# EAGLE board Module-paneled (EAGLE 6.6.0)
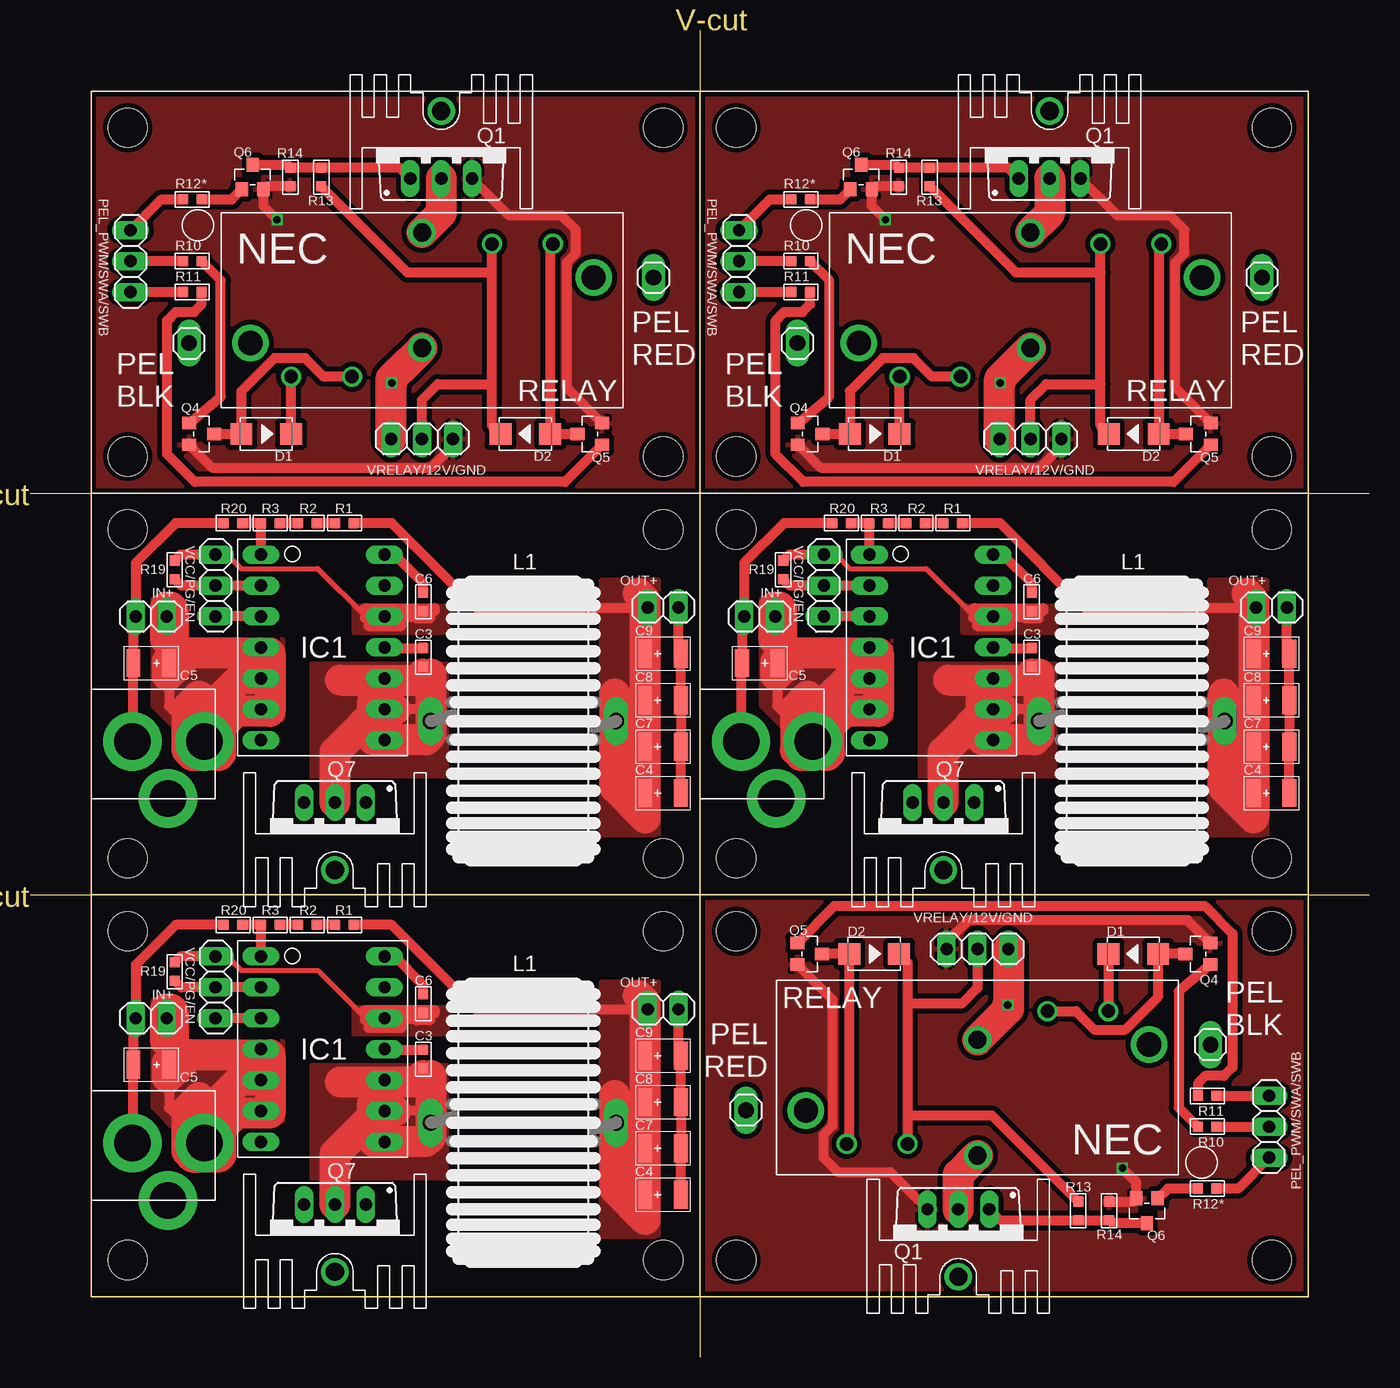
[diagram p0: board, top side]
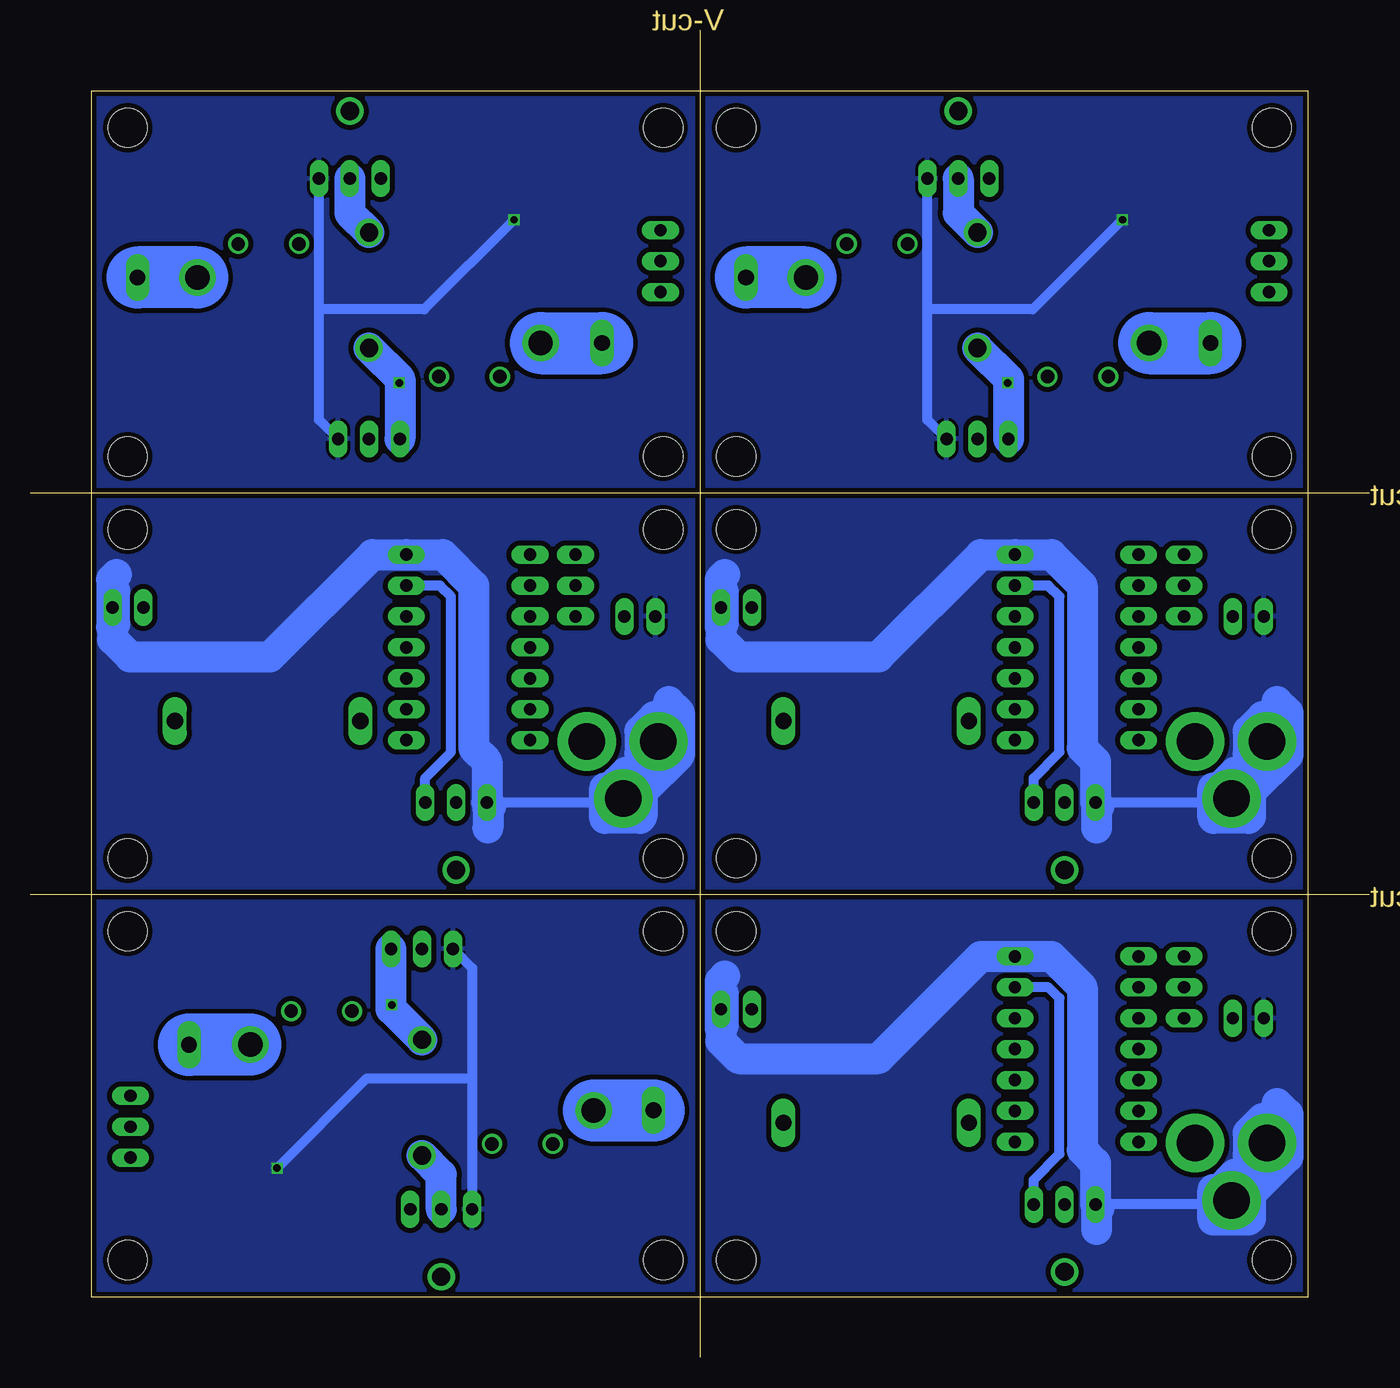
[diagram p1: board, bottom side, seen from below]

Size 110 x 109 mm. Coordinates in mm from the lower left corner, seen from the top.
Outline: 55,109 55,0
Outline: 0,38 110,38
Outline: 0,71 110,71
Outline: 5,104 105,104 105,5 5,5 5,104
Copper layers (1*16): Top 0.035mm / dielectric 1.5mm / Bottom 0.035mm
Design rules "SeeedStudio_2layer_DRU_no_angle_20140221": minimum track width 6mil, minimum drill 12mil, track to track 6mil, track to pad 6mil, pad to pad 6mil, via to via 6mil, smd to smd 0mil, copper to edge 10mil, drill to drill 10mil, minimum pad ring 10mil, minimum via ring 6mil, stop-mask expansion 2mil, vias tented up to drill 100mil, thermal gap 10mil
Holes 3.2 mm at 8,68 8,41 52,41 52,68 58,68 58,41 102,41 102,68 8,101 52,101 52,74 8,74 58,101 102,101 102,74 58,74 8,35 8,8 52,8 52,35 102,8 58,8 58,35 102,35

## Footprints (pad centres in the part's own frame; a part is rotated, then mirrored left to right if it is on the bottom)
AVX-B = smd 1.143 x 2.286: + -1.46,0; - 1.46,0
C0603 = smd 0.889 x 0.889: 1 0,0.762; 2 0,-0.762
DO-214AC = smd 1.8 x 1.77: 1 -2.042,0; 2 2.042,0
HEAT11PB015 = drill 1.5: P$1 0,3
RT7258GQW-BREAK = drill 1.016 long: P$1 -5.08,7.62; P$2 -5.08,5.08; P$3 -5.08,2.54; P$4 -5.08,0; P$5 -5.08,-2.54; P$6 -5.08,-5.08; P$7 -5.08,-7.62; P$8 5.08,-7.62; P$9 5.08,-5.08; P$10 5.08,-2.54; P$11 5.08,0; P$12 5.08,2.54; P$13 5.08,5.08; P$14 5.08,7.62
1X02 = drill 1.016 long: 1 -1.27,0; 2 1.27,0
PJ-102A-NOOUT = drill 3 pad 4.8: RING 0.1,-3.39; RING_SW -4.6,-6.29; TIP 0.1,-9.29
SFT1240 = drill 1.321 long: 1 -7.62,0; 2 7.62,0
1X03 = drill 1.016 long: 1 -2.54,0; 2 0,0; 3 2.54,0
1X01LONG = drill 1.3 long: 1 0,0
TO220BV = drill 1.016 long: D 0,-2.54; G -2.54,-2.54; S 2.54,-2.54
SOT-23 = smd 1.016 x 1.143: 1 -0.889,-1.016; 2 0.889,-1.016; 3 0,1.016
R0603 = smd 0.889 x 0.889: 1 0,0.762; 2 0,-0.762
NEC-EP2 = drill 2: P$1 -14.1,-2.7; P$8 14.1,2.7 | drill 1.1: P$2 -10.75,-5.45; P$3 -5.75,-5.45; P$6 5.75,5.45; P$7 10.75,5.45 | drill 1.5: P$4 0,-3.1; P$5 0,6.4

## Placement (x,y rotation side)
C1  22uf  [AVX-B]  59.92,57.04 180 top
C2  1uf  [C0603]  82.28,62.05 0 top
C3  1uf  [C0603]  32.28,57.51 180 top
C4  22uf  [AVX-B]  51.99,46.36 0 top
C5  22uf  [AVX-B]  9.92,57.04 180 top
C6  1uf  [C0603]  32.28,62.05 0 top
C7  22uf  [AVX-B]  51.99,50.17 0 top
C8  22uf  [AVX-B]  51.99,53.98 0 top
C9  22uf  [AVX-B]  51.99,57.79 0 top
C10  1uf  [C0603]  82.28,57.51 180 top
C11  22uf  [AVX-B]  101.99,46.36 0 top
C12  22uf  [AVX-B]  101.99,50.17 0 top
C13  22uf  [AVX-B]  101.99,53.98 0 top
C14  22uf  [AVX-B]  101.99,57.79 0 top
C15  22uf  [AVX-B]  9.92,24.04 180 top
C16  1uf  [C0603]  32.28,29.05 0 top
C17  1uf  [C0603]  32.28,24.51 180 top
C18  22uf  [AVX-B]  51.99,13.36 0 top
C19  22uf  [AVX-B]  51.99,17.17 0 top
C20  22uf  [AVX-B]  51.99,20.98 0 top
C21  22uf  [AVX-B]  51.99,24.79 0 top
D1  1N4007  [DO-214AC]  19.38,75.85 0 top
D2  1N4007  [DO-214AC]  40.66,75.85 180 top
D3  1N4007  [DO-214AC]  69.38,75.85 0 top
D4  1N4007  [DO-214AC]  90.66,75.85 180 top
D5  1N4007  [DO-214AC]  90.62,33.15 180 top
D6  1N4007  [DO-214AC]  69.34,33.15 0 top
HEATSINK  HEAT111PB015  [HEAT11PB015]  33.75,99.37 0 top
HEATSINK1  HEAT111PB015  [HEAT11PB015]  25.02,43.03 180 top
HEATSINK2  HEAT111PB015  [HEAT11PB015]  75.02,43.03 180 top
HEATSINK3  HEAT111PB015  [HEAT11PB015]  83.75,99.37 0 top
HEATSINK4  HEAT111PB015  [HEAT11PB015]  25.02,10.03 180 top
HEATSINK5  HEAT111PB015  [HEAT11PB015]  76.25,9.63 180 top
IC1  RT7258-BREAKQWB  [RT7258GQW-BREAK]  24.02,58.32 0 top
IC2  RT7258-BREAKQWB  [RT7258GQW-BREAK]  74.02,58.32 0 top
IC3  RT7258-BREAKQWB  [RT7258GQW-BREAK]  24.02,25.32 0 top
IN  [1X02]  9.92,60.86 180 top
IN1  [1X02]  59.92,60.86 180 top
IN2  [1X02]  9.92,27.86 180 top
JACK  2.1MMJACKTHM-NOOUT  [PJ-102A-NOOUT]  5,50.5 90 top
JACK1  2.1MMJACKTHM-NOOUT  [PJ-102A-NOOUT]  55,50.5 90 top
JACK2  2.1MMJACKTHM-NOOUT  [PJ-102A-NOOUT]  5,17.5 90 top
L1  SFT1240  [SFT1240]  40.51,52.27 0 top
L2  SFT1240  [SFT1240]  90.51,52.27 0 top
L3  SFT1240  [SFT1240]  40.51,19.27 0 top
LOGIC  [1X03]  8.23,90.05 90 top
LOGIC1  [1X03]  58.23,90.05 90 top
LOGIC2  [1X03]  101.77,18.95 270 top
MONITOR  [1X03]  15.21,63.4 270 top
MONITOR1  [1X03]  65.21,63.4 270 top
MONITOR2  [1X03]  15.21,30.4 270 top
OUT  [1X02]  51.99,61.6 0 top
OUT1  [1X02]  101.99,61.6 0 top
OUT2  [1X02]  51.99,28.6 0 top
PEL_BLK  [1X01LONG]  13.03,83.32 90 top
PEL_BLK1  [1X01LONG]  63.03,83.32 90 top
PEL_BLK2  [1X01LONG]  96.97,25.68 270 top
PEL_RED  [1X01LONG]  51.2,88.7 90 top
PEL_RED1  [1X01LONG]  101.2,88.7 90 top
PEL_RED2  [1X01LONG]  58.8,20.3 270 top
POWER  [1X03]  32.18,75.44 0 top
POWER1  [1X03]  82.18,75.44 0 top
POWER2  [1X03]  77.82,33.55 180 top
Q1  IRLB3813PBF  [TO220BV]  75.02,43.03 180 top
Q2  IRLB3813PBF  [TO220BV]  33.75,99.37 0 top
Q3  S9013  [SOT-23]  64.07,75.85 270 top
Q4  S9013  [SOT-23]  14.07,75.85 270 top
Q5  S9013  [SOT-23]  45.97,75.85 90 top
Q6  S9013  [SOT-23]  18.26,96.96 0 top
Q7  IRLB3813PBF  [TO220BV]  25.02,43.03 180 top
Q8  S9013  [SOT-23]  95.97,75.85 90 top
Q9  S9013  [SOT-23]  68.26,96.96 0 top
Q10  IRLB3813PBF  [TO220BV]  83.75,99.37 0 top
Q11  IRLB3813PBF  [TO220BV]  25.02,10.03 180 top
Q12  S9013  [SOT-23]  95.93,33.15 90 top
Q13  S9013  [SOT-23]  64.03,33.15 270 top
Q14  S9013  [SOT-23]  91.74,12.04 180 top
Q15  IRLB3813PBF  [TO220BV]  76.25,9.63 180 top
R1  10K 1/10W  [R0603]  25.8,68.53 90 top
R2  10K 1/10W  [R0603]  22.75,68.53 90 top
R3  10K 1/10W  [R0603]  19.7,68.53 90 top
R4  10K 1/10W  [R0603]  61.86,64.7 0 top
R5  10K 1/10W  [R0603]  66.66,68.53 90 top
R6  10K 1/10W  [R0603]  75.8,68.53 90 top
R7  10K 1/10W  [R0603]  72.75,68.53 90 top
R8  10K 1/10W  [R0603]  69.7,68.53 90 top
R9  1K 1/10W  [R0603]  63.31,95.13 90 top
R10  10K 1/10W  [R0603]  13.31,90.05 90 top
R11  10K 1/10W  [R0603]  13.31,87.51 270 top
R12  1K 1/10W  [R0603]  13.31,95.13 90 top
R13  10K 1/10W  [R0603]  23.9,96.96 0 top
R14  10K 1/10W  [R0603]  21.36,96.96 180 top
R15  10K 1/10W  [R0603]  73.9,96.96 0 top
R16  10K 1/10W  [R0603]  71.36,96.96 180 top
R17  10K 1/10W  [R0603]  63.31,90.05 90 top
R18  10K 1/10W  [R0603]  63.31,87.51 270 top
R19  10K 1/10W  [R0603]  11.86,64.7 0 top
R20  10K 1/10W  [R0603]  16.66,68.53 90 top
R21  10K 1/10W  [R0603]  11.86,31.7 0 top
R22  10K 1/10W  [R0603]  16.66,35.53 90 top
R23  10K 1/10W  [R0603]  25.8,35.53 90 top
R24  10K 1/10W  [R0603]  22.75,35.53 90 top
R25  10K 1/10W  [R0603]  19.7,35.53 90 top
R26  1K 1/10W  [R0603]  96.69,13.87 270 top
R27  10K 1/10W  [R0603]  86.1,12.04 180 top
R28  10K 1/10W  [R0603]  88.64,12.04 0 top
R29  10K 1/10W  [R0603]  96.69,18.95 270 top
R30  10K 1/10W  [R0603]  96.69,21.49 90 top
RELAY  NEC-RELAY2EP2  [NEC-EP2]  32.18,86.01 0 top
RELAY1  NEC-RELAY2EP2  [NEC-EP2]  82.18,86.01 0 top
RELAY2  NEC-RELAY2EP2  [NEC-EP2]  77.82,22.99 180 top

## Library data of the parts
C1 C4 C5 C7-C9 C11-C15 C18-C21 = Seeed-Capacitor; MPN: TAJB226*016#NJ
C2 C3 C6 C10 C16 C17 = Seeed-Capacitor; MPN: CC0603KRX7R8BB105
D1-D6 = Seeed-Diode; MPN: 1N4007
HEATSINK HEATSINK1-HEATSINK5 = PCR-Connector
IC1-IC3 = PCR-IC
IN IN1 IN2 LOGIC LOGIC1 LOGIC2 MONITOR MONITOR1 MONITOR2 OUT OUT1 OUT2 PEL_BLK PEL_BLK1 PEL_BLK2 PEL_RED PEL_RED1 PEL_RED2 POWER POWER1 POWER2 = pinhead
JACK JACK1 JACK2 = adafruit
L1-L3 = inductors
Q1 Q2 Q7 Q10 Q11 Q15 = transistor-power
Q3-Q6 Q8 Q9 Q12-Q14 = Seeed-Transistor; MPN: S9013
R1-R8 R10 R11 R13-R25 R27-R30 = Seeed-Resistor; MPN: RC0603JR-0710KL
R9 R12 R26 = Seeed-Resistor; MPN: RC0603JR-071KL
RELAY RELAY1 RELAY2 = PCR-Switch

## Nets
3V1: C11.+ C12.+ C13.+ C14.+ L2.2 OUT1.1 R6.2
3V2: C18.+ C19.+ C20.+ C21.+ L3.2 OUT2.1 R23.2
3V3: C4.+ C7.+ C8.+ C9.+ L1.2 OUT.1 R1.2
12V: C5.+ IC1.P$4 IC1.P$5 IC1.P$6 IN.1 JACK.TIP
12V1: C1.+ IC2.P$4 IC2.P$5 IC2.P$6 IN1.1 JACK1.TIP
12V2: D2.2 POWER.2 R13.2 RELAY.P$6
12V3: D4.2 POWER1.2 R15.2 RELAY1.P$6
12V4: C15.+ IC3.P$4 IC3.P$5 IC3.P$6 IN2.1 JACK2.TIP
12V5: D6.2 POWER2.2 R27.2 RELAY2.P$6
EN/SYNC: IC1.P$3 MONITOR.3
EN/SYNC1: IC2.P$3 MONITOR1.3
EN/SYNC2: IC3.P$3 MONITOR2.3
FB: IC1.P$1 R3.1 R20.2
FB1: IC2.P$1 R5.2 R8.1
FB2: IC3.P$1 R22.2 R25.1
GND: C4.- C5.- C6.1 C7.- C8.- C9.- IC1.P$14 IN.2 JACK.RING JACK.RING_SW OUT.2 Q7.S R20.1
GND1: C1.- C2.1 C11.- C12.- C13.- C14.- IC2.P$14 IN1.2 JACK1.RING JACK1.RING_SW OUT1.2 Q1.S R5.1
GND2: POWER.3 Q2.S Q4.2 Q5.2 Q6.2 R14.1
GND3: POWER1.3 Q3.2 Q8.2 Q9.2 Q10.S R16.1
GND4: C15.- C16.1 C18.- C19.- C20.- C21.- IC3.P$14 IN2.2 JACK2.RING JACK2.RING_SW OUT2.2 Q11.S R22.1
GND5: POWER2.3 Q12.2 Q13.2 Q14.2 Q15.S R28.1
N$1: R2.1 R3.2
N$2: R1.1 R2.2
N$3: C10.2 IC2.P$11
N$4: IC2.P$13 Q1.G
N$5: R7.1 R8.2
N$6: R6.1 R7.2
N$7: Q2.D RELAY.P$5
N$8: Q2.G Q6.3 R13.1 R14.2
N$9: PEL_RED.1 RELAY.P$8
N$10: PEL_BLK.1 RELAY.P$1
N$11: D1.2 RELAY.P$2
N$12: Q10.D RELAY1.P$5
N$13: C3.2 IC1.P$11
N$14: Q9.3 Q10.G R15.1 R16.2
N$15: IC1.P$13 Q7.G
N$16: Q9.1 R9.2
N$17: D3.1 Q3.3 RELAY1.P$3
N$18: D4.1 Q8.3 RELAY1.P$7
N$19: Q3.1 R17.2
N$20: Q8.1 R18.1
N$21: PEL_RED1.1 RELAY1.P$8
N$22: PEL_BLK1.1 RELAY1.P$1
N$23: D3.2 RELAY1.P$2
N$24: C17.2 IC3.P$11
N$25: IC3.P$13 Q11.G
N$26: R24.1 R25.2
N$27: R23.1 R24.2
N$28: Q15.D RELAY2.P$5
N$29: Q14.3 Q15.G R27.1 R28.2
N$30: Q6.1 R12.2
N$31: Q14.1 R26.2
N$32: D5.1 Q12.3 RELAY2.P$3
N$33: D1.1 Q4.3 RELAY.P$3
N$34: Q4.1 R10.2
N$35: Q5.1 R11.1
N$36: D2.1 Q5.3 RELAY.P$7
N$37: D6.1 Q13.3 RELAY2.P$7
N$38: Q12.1 R29.2
N$39: Q13.1 R30.1
N$40: PEL_RED2.1 RELAY2.P$8
N$41: PEL_BLK2.1 RELAY2.P$1
N$42: D5.2 RELAY2.P$2
PEL_PWM: LOGIC.3 R12.1
PEL_PWM1: LOGIC1.3 R9.1
PEL_PWM2: LOGIC2.3 R26.1
PEL_SWA: LOGIC.2 R10.1
PEL_SWA1: LOGIC1.2 R17.1
PEL_SWA2: LOGIC2.2 R29.1
PEL_SWB: LOGIC.1 R11.2
PEL_SWB1: LOGIC1.1 R18.2
PEL_SWB2: LOGIC2.1 R30.2
PGOOD: IC1.P$2 MONITOR.2 R19.2
PGOOD1: IC2.P$2 MONITOR1.2 R4.2
PGOOD2: IC3.P$2 MONITOR2.2 R21.2
SW: C3.1 IC1.P$8 IC1.P$9 IC1.P$10 L1.1 Q7.D
SW1: C10.1 IC2.P$8 IC2.P$9 IC2.P$10 L2.1 Q1.D
SW2: C17.1 IC3.P$8 IC3.P$9 IC3.P$10 L3.1 Q11.D
VCC: C6.2 IC1.P$12 MONITOR.1 R19.1
VCC1: C2.2 IC2.P$12 MONITOR1.1 R4.1
VCC2: C16.2 IC3.P$12 MONITOR2.1 R21.1
VRELAY: POWER.1 RELAY.P$4
VRELAY1: POWER1.1 RELAY1.P$4
VRELAY2: POWER2.1 RELAY2.P$4

## Tracks (layer width: path | path; a pad name or v marks a point on that pad's centre or on a via)
3V1
  Top 0.813: 100.53,52.35 C13.+ C14.+ 100.53,60.44 OUT1.1 86.62,61.6 79.69,68.53 R6.2 | 100.53,52.35 C12.+ C11.+ | L2.2 98.2,52.35 100.53,52.35
  Top 2.54: 99.95,62.74 100.51,62.18 100.51,44.33 98.03,46.81 98.03,54.51
  pour Top: 101.58,63.86 101.58,42.9 96.93,42.9 96.93,63.86
3V2
  Top 0.813: 50.53,19.35 C20.+ C21.+ 50.53,27.44 OUT2.1 36.62,28.6 29.69,35.53 R23.2 | 50.53,19.35 C19.+ C18.+ | L3.2 48.2,19.35 50.53,19.35
  Top 2.54: 49.95,29.74 50.51,29.18 50.51,11.32 48.02,13.81 48.02,21.51
  pour Top: 51.58,30.86 51.58,9.9 46.93,9.9 46.93,30.86
3V3
  Top 0.813: 50.53,52.35 C8.+ C9.+ 50.53,60.44 OUT.1 36.62,61.6 29.69,68.53 R1.2 | 50.53,52.35 C7.+ C4.+ | L1.2 48.2,52.35 50.53,52.35
  Top 2.54: 49.95,62.74 50.51,62.18 50.51,44.33 48.02,46.81 48.02,54.51
  pour Top: 51.58,63.86 51.58,42.9 46.93,42.9 46.93,63.86
12V
  Top 0.813: IC1.P$4 IC1.P$5 IC1.P$6 | IC1.P$6 18.75,53.05 | IC1.P$6 16.93,53.24 JACK.TIP 11.38,53.5 C5.+ 11.38,60.67 IN.1
  Top 2.54: 11.48,58.65 11.1,59.03 11.1,61.62 11.55,61.62 11.73,61.44 11.73,58.45 11.86,58.32 11.86,57.76 11.22,57.13 11.22,56.06 11.27,56.01 13.13,57.86 19.68,57.86 19.68,53.06 16.89,53.06 15.49,51.66 15.49,49.45 | 15.49,49.45 13.87,49.45 | 13.87,49.45 13.87,54.33 12.85,53.32 12.85,49.91 13.31,49.45 13.87,49.45 | 15.49,49.45 15.67,49.63 15.67,54.23 17.24,55.8 18.79,55.8
  pour Top: 10.03,62.26 10.03,53.57 12.26,51.34 16.48,51.34 17.57,52.43 20.75,52.43 20.75,58.93 12.42,58.93 12.42,62.26
12V1
  Top 0.813: IC2.P$4 IC2.P$5 IC2.P$6 | IC2.P$6 68.75,53.05 | IC2.P$6 66.93,53.24 JACK1.TIP 61.38,53.5 C1.+ 61.38,60.67 IN1.1
  Top 2.54: 61.48,58.65 61.1,59.03 61.1,61.62 61.55,61.62 61.73,61.44 61.73,58.45 61.86,58.32 61.86,57.76 61.22,57.13 61.22,56.06 61.27,56.01 63.13,57.86 69.68,57.86 69.68,53.06 66.89,53.06 65.49,51.66 65.49,49.45 | 65.49,49.45 63.87,49.45 | 63.87,49.45 63.87,54.33 62.85,53.32 62.85,49.91 63.31,49.45 63.87,49.45 | 65.49,49.45 65.67,49.63 65.67,54.23 67.24,55.8 68.79,55.8
  pour Top: 60.03,62.26 60.03,53.57 62.26,51.34 66.48,51.34 67.57,52.43 70.75,52.43 70.75,58.93 62.42,58.93 62.42,62.26
12V2
  Top 0.813: POWER.2 32.18,78.65 33.47,79.94 37.93,79.94 | 37.93,89.14 RELAY.P$6 | R13.2 30.96,89.14 37.93,89.14 | D2.2 37.93,76.54 37.93,79.94 | 37.93,79.94 37.93,89.14
12V3
  Top 0.813: POWER1.2 82.18,78.65 83.47,79.94 87.93,79.94 | 87.93,89.14 RELAY1.P$6 | R15.2 80.96,89.14 87.93,89.14 | D4.2 87.93,76.54 87.93,79.94 | 87.93,79.94 87.93,89.14
12V4
  Top 0.813: IC3.P$4 IC3.P$5 IC3.P$6 | IC3.P$6 18.75,20.05 | IC3.P$6 16.93,20.24 JACK2.TIP 11.38,20.5 C15.+ 11.38,27.67 IN2.1
  Top 2.54: 11.48,25.65 11.1,26.03 11.1,28.62 11.55,28.62 11.73,28.44 11.73,25.45 11.86,25.32 11.86,24.76 11.22,24.13 11.22,23.06 11.27,23.01 13.13,24.86 19.68,24.86 19.68,20.06 16.89,20.06 15.49,18.66 15.49,16.45 | 15.49,16.45 13.87,16.45 | 13.87,16.45 13.87,21.33 12.85,20.32 12.85,16.91 13.31,16.45 13.87,16.45 | 15.49,16.45 15.67,16.63 15.67,21.23 17.24,22.8 18.79,22.8
  pour Top: 10.03,29.26 10.03,20.57 12.26,18.34 16.48,18.34 17.57,19.43 20.75,19.43 20.75,25.93 12.42,25.93 12.42,29.26
12V5
  Top 0.813: POWER2.2 77.82,30.36 76.53,29.06 72.07,29.06 | 72.07,19.86 RELAY2.P$6 | R27.2 79.04,19.86 72.07,19.86 | D6.2 72.07,32.46 72.07,29.06 | 72.07,29.06 72.07,19.86
EN/SYNC
  Top 0.813: IC1.P$3 MONITOR.3
EN/SYNC1
  Top 0.813: IC2.P$3 MONITOR1.3
EN/SYNC2
  Top 0.813: IC3.P$3 MONITOR2.3
FB
  Top 0.813: R20.2 R3.1 IC1.P$1
FB1
  Top 0.813: R5.2 R8.1 IC2.P$1
FB2
  Top 0.813: R22.2 R25.1 IC3.P$1
GND
  Top 0.813: C6.1 32.28,63.58 29.91,65.94 IC1.P$14 | C4.- C7.- C8.- C9.- 53.26,57.01 OUT.2 | R20.1 11.93,68.53 8.65,65.25 IN.2 8.46,60.67 C5.- 8.39,56.96 JACK.RING
  Bottom 0.813: JACK.RING 8.39,48.8 JACK.RING_SW 11.62,45.57 Q7.S
  Bottom 2.54: Q7.S 22.48,48.96 23.57,50.04 23.57,63.4 26.11,65.94 IC1.P$14 31.9,65.94 40.31,57.53 51.81,57.53 53.26,58.98 OUT.2 | 7.56,53.88 6.68,52.99 6.68,49.48 9.75,46.41 9.75,44.43 9.9,44.27 12.8,44.27 12.82,44.3 12.82,46.79 12.32,46.79 11.02,48.08 10.11,48.08 8.5,49.68 8.5,52.5 8.63,52.63 8.73,52.63 9.93,51.44 9.93,49.61 9.88,49.56 | 52.93,64.31 53.34,63.91 53.34,60 53.06,60.28 53.06,62.89 | 22.17,45.29 22.4,45.06 22.4,43.49
  pour Bottom (isolate 0.406): 5.5,70.5 54.5,70.5 54.5,38.5 5.5,38.5
GND1
  Top 0.813: C2.1 82.28,63.58 79.92,65.94 IC2.P$14 | C11.- C12.- C13.- C14.- 103.26,57.01 OUT1.2 | R5.1 61.93,68.53 58.66,65.25 IN1.2 58.46,60.67 C1.- 58.39,56.96 JACK1.RING
  Bottom 0.813: JACK1.RING 58.39,48.8 JACK1.RING_SW 61.62,45.57 Q1.S
  Bottom 2.54: Q1.S 72.48,48.96 73.56,50.04 73.56,63.4 76.11,65.94 IC2.P$14 81.9,65.94 90.31,57.53 101.81,57.53 103.26,58.98 OUT1.2 | 57.56,53.88 56.68,52.99 56.68,49.48 59.75,46.41 59.75,44.43 59.9,44.27 62.8,44.27 62.82,44.3 62.82,46.79 62.31,46.79 61.02,48.08 60.1,48.08 58.51,49.68 58.51,52.5 58.63,52.63 58.73,52.63 59.93,51.44 59.93,49.61 59.88,49.56 | 102.93,64.31 103.34,63.91 103.34,60 103.06,60.28 103.06,62.89 | 72.17,45.29 72.4,45.06 72.4,43.49
  pour Bottom (isolate 0.406): 55.5,70.5 104.5,70.5 104.5,38.5 55.5,38.5
GND2  (via drill 0.6)
  Top 0.813: R14.1 19.4,96.2 Q6.2 19.15,94.57 v20.27,93.45 | Q2.S 39.34,93.78 43.66,93.78 44.83,92.62 44.83,90.71 44.09,89.97 44.09,79.64 Q5.2 | Q4.2 14.93,73.08 32.94,73.08 34.72,74.86 POWER.3
  Bottom 0.813: POWER.3 36.29,77.02 36.29,86.09 | 36.29,86.09 Q2.S | v20.27,93.45 27.63,86.09 36.29,86.09
  pour Bottom (isolate 0.406): 5.5,103.5 54.5,103.5 54.5,71.5 5.5,71.5
  pour Top (isolate 0.406): 5.5,103.5 5.5,71.5 54.5,71.5 54.5,103.5
GND3  (via drill 0.6)
  Top 0.813: R16.1 69.4,96.2 Q9.2 69.15,94.57 v70.27,93.45 | Q10.S 89.34,93.78 93.66,93.78 94.83,92.62 94.83,90.71 94.09,89.97 94.09,79.64 Q8.2 | Q3.2 64.93,73.08 82.94,73.08 84.72,74.86 POWER1.3
  Bottom 0.813: POWER1.3 86.29,77.02 86.29,86.09 | 86.29,86.09 Q10.S | v70.27,93.45 77.63,86.09 86.29,86.09
  pour Bottom (isolate 0.406): 55.5,103.5 104.5,103.5 104.5,71.5 55.5,71.5
  pour Top (isolate 0.406): 55.5,103.5 55.5,71.5 104.5,71.5 104.5,103.5
GND4
  Top 0.813: C16.1 32.28,30.58 29.91,32.94 IC3.P$14 | C18.- C19.- C20.- C21.- 53.26,24.01 OUT2.2 | R22.1 11.93,35.53 8.65,32.25 IN2.2 8.46,27.67 C15.- 8.39,23.96 JACK2.RING
  Bottom 0.813: JACK2.RING 8.39,15.8 JACK2.RING_SW 11.62,12.57 Q11.S
  Bottom 2.54: Q11.S 22.48,15.96 23.57,17.04 23.57,30.4 26.11,32.94 IC3.P$14 31.9,32.94 40.31,24.53 51.81,24.53 53.26,25.98 OUT2.2 | 7.56,20.88 6.68,19.99 6.68,16.48 9.75,13.41 9.75,11.43 9.9,11.27 12.8,11.27 12.82,11.3 12.82,13.79 12.32,13.79 11.02,15.08 10.11,15.08 8.5,16.68 8.5,19.5 8.63,19.63 8.73,19.63 9.93,18.44 9.93,16.61 9.88,16.56 | 52.93,31.31 53.34,30.91 53.34,27 53.06,27.28 53.06,29.89 | 22.17,12.29 22.4,12.06 22.4,10.49
  pour Bottom (isolate 0.406): 5.5,37.5 54.5,37.5 54.5,5.5 5.5,5.5
GND5  (via drill 0.6)
  Top 0.813: R28.1 90.6,12.8 Q14.2 90.85,14.43 v89.73,15.55 | Q15.S 70.66,15.22 66.34,15.22 65.17,16.39 65.17,18.29 65.91,19.03 65.91,29.36 Q13.2 | Q12.2 95.07,35.92 77.06,35.92 75.28,34.14 POWER2.3
  Bottom 0.813: POWER2.3 73.71,31.98 73.71,22.91 | 73.71,22.91 Q15.S | v89.73,15.55 82.37,22.91 73.71,22.91
  pour Bottom (isolate 0.406): 104.5,5.5 55.5,5.5 55.5,37.5 104.5,37.5
  pour Top (isolate 0.406): 104.5,5.5 104.5,37.5 55.5,37.5 55.5,5.5
N$1
  Top 0.813: R2.1 R3.2
N$2
  Top 0.813: R1.1 R2.2
N$3
  Top 0.813: IC2.P$11 79.15,58.27 C10.2
N$4
  Bottom 0.813: Q1.G 77.56,47.59 75.44,49.71 75.44,62.51 76.33,63.4 IC2.P$13
N$5
  Top 0.813: R7.1 R8.2
N$6
  Top 0.813: R6.1 R7.2
N$7
  Top 2.54: Q2.D 33.75,93.99 RELAY.P$5
  Bottom 2.54: Q2.D 33.75,93.99 RELAY.P$5
N$8
  Top 0.813: Q6.3 21.1,97.97 R14.2 R13.1 30.32,97.72 Q2.G
N$9
  Bottom 5.08: RELAY.P$8 PEL_RED.1
N$10
  Bottom 5.08: RELAY.P$1 PEL_BLK.1
N$11
  Top 0.813: D1.2 RELAY.P$2
N$12
  Top 2.54: Q10.D 83.75,93.99 RELAY1.P$5
  Bottom 2.54: Q10.D 83.75,93.99 RELAY1.P$5
N$13
  Top 0.813: IC1.P$11 29.15,58.27 C3.2
N$14
  Top 0.813: Q9.3 71.1,97.97 R16.2 R15.1 80.32,97.72 Q10.G
N$15
  Bottom 0.813: Q7.G 27.56,47.59 25.44,49.71 25.44,62.51 26.33,63.4 IC1.P$13
N$16
  Top 0.813: R9.2 66.56,95.13 Q9.1
N$17
  Top 0.813: RELAY1.P$3 74.09,80.56 72.58,82.07 70.04,82.07 67.33,79.37 D3.1 Q3.3
N$18
  Top 0.813: Q8.3 D4.1 92.7,91.24 RELAY1.P$7
N$19
  Top 0.813: Q3.1 65.64,78.92 65.64,88.47 R17.2
N$20
  Top 0.813: Q8.1 93.94,71.91 63.51,71.91 61.22,74.2 61.22,85.17 61.93,85.88 63.46,85.88 64.07,86.49 R18.1
N$21
  Bottom 5.08: RELAY1.P$8 PEL_RED1.1
N$22
  Bottom 5.08: RELAY1.P$1 PEL_BLK1.1
N$23
  Top 0.813: D3.2 RELAY1.P$2
N$24
  Top 0.813: IC3.P$11 29.15,25.27 C17.2
N$25
  Bottom 0.813: Q11.G 27.56,14.59 25.44,16.71 25.44,29.51 26.33,30.4 IC3.P$13
N$26
  Top 0.813: R24.1 R25.2
N$27
  Top 0.813: R23.1 R24.2
N$28
  Top 2.54: Q15.D 76.25,15.01 RELAY2.P$5
  Bottom 2.54: Q15.D 76.25,15.01 RELAY2.P$5
N$29
  Top 0.813: Q14.3 88.9,11.02 R28.2 R27.1 79.68,11.28 Q15.G
N$30
  Top 0.813: R12.2 16.56,95.13 Q6.1
N$31
  Top 0.813: R26.2 93.44,13.87 Q14.1
N$32
  Top 0.813: RELAY2.P$3 85.91,28.44 87.42,26.93 89.96,26.93 92.67,29.63 D5.1 Q12.3
N$33
  Top 0.813: RELAY.P$3 24.09,80.56 22.58,82.07 20.04,82.07 17.33,79.37 D1.1 Q4.3
N$34
  Top 0.813: Q4.1 15.64,78.92 15.64,88.47 R10.2
N$35
  Top 0.813: Q5.1 43.94,71.91 13.51,71.91 11.22,74.2 11.22,85.17 11.93,85.88 13.46,85.88 14.07,86.49 R11.1
N$36
  Top 0.813: Q5.3 D2.1 42.7,91.24 RELAY.P$7
N$37
  Top 0.813: Q13.3 D6.1 67.3,17.76 RELAY2.P$7
N$38
  Top 0.813: Q12.1 94.36,30.07 94.36,20.52 R29.2
N$39
  Top 0.813: Q13.1 66.06,37.09 96.49,37.09 98.78,34.8 98.78,23.83 98.07,23.12 96.54,23.12 95.93,22.51 R30.1
N$40
  Bottom 5.08: RELAY2.P$8 PEL_RED2.1
N$41
  Bottom 5.08: RELAY2.P$1 PEL_BLK2.1
N$42
  Top 0.813: D5.2 RELAY2.P$2
PEL_PWM
  Top 0.813: LOGIC.3 10.77,95.13 R12.1
PEL_PWM1
  Top 0.813: LOGIC1.3 60.77,95.13 R9.1
PEL_PWM2
  Top 0.813: LOGIC2.3 99.23,13.87 R26.1
PEL_SWA
  Top 0.813: R10.1 LOGIC.2
PEL_SWA1
  Top 0.813: R17.1 LOGIC1.2
PEL_SWA2
  Top 0.813: R29.1 LOGIC2.2
PEL_SWB
  Top 0.813: R11.2 LOGIC.1
PEL_SWB1
  Top 0.813: R18.2 LOGIC1.1
PEL_SWB2
  Top 0.813: R30.2 LOGIC2.1
PGOOD
  Top 0.813: IC1.P$2 MONITOR.2 12.39,63.4 R19.2
PGOOD1
  Top 0.813: IC2.P$2 MONITOR1.2 62.39,63.4 R4.2
PGOOD2
  Top 0.813: IC3.P$2 MONITOR2.2 12.39,30.4 R21.2
SW
  Top 0.813: IC1.P$9 29.1,53.8 IC1.P$10 31.74,55.78 C3.1 | IC1.P$9 IC1.P$8 26.28,50.7 | L1.1 31.92,53.24 29.99,53.24 IC1.P$9
  Top 2.54: 25.47,55.63 32.25,55.63 32.25,56.14 32.89,56.14 32.89,51.11 32.5,50.73 28.24,50.73 28.14,50.83 28.14,53.95 28.85,53.24 29.99,53.24 | Q7.D 25.02,49.72 29.1,53.8
  pour Top: 23.06,57.08 34.26,57.08 34.26,47.65 23.06,47.65
SW1
  Top 0.813: IC2.P$9 79.1,53.8 IC2.P$10 81.74,55.78 C10.1 | IC2.P$9 IC2.P$8 76.28,50.7 | L2.1 81.92,53.24 79.99,53.24 IC2.P$9
  Top 2.54: 75.47,55.63 82.25,55.63 82.25,56.14 82.89,56.14 82.89,51.11 82.5,50.73 78.24,50.73 78.14,50.83 78.14,53.95 78.85,53.24 79.99,53.24 | Q1.D 75.02,49.72 79.1,53.8
  pour Top: 73.06,57.08 84.26,57.08 84.26,47.65 73.06,47.65
SW2
  Top 0.813: IC3.P$9 29.1,20.8 IC3.P$10 31.74,22.78 C17.1 | IC3.P$9 IC3.P$8 26.28,17.7 | L3.1 31.92,20.24 29.99,20.24 IC3.P$9
  Top 2.54: 25.47,22.63 32.25,22.63 32.25,23.14 32.89,23.14 32.89,18.11 32.5,17.73 28.24,17.73 28.14,17.83 28.14,20.95 28.85,20.24 29.99,20.24 | Q11.D 25.02,16.72 29.1,20.8
  pour Top: 23.06,24.08 34.26,24.08 34.26,14.65 23.06,14.65
VCC
  Top 0.406: MONITOR.1 16.17,65.94 17.32,64.8 23.61,64.8 27.55,60.86 IC1.P$12 31.84,60.86 C6.2
  Top 0.813: MONITOR.1 12.34,65.94 R19.1 | 27.32,61.44 27.58,61.44 27.58,61.55 33.22,61.55 33.22,61.29 32.84,61.29 32.84,60.68 31.77,60.68 31.77,60.78 27.48,60.78 27.48,60.73 27.78,60.73 27.78,60.07 30.5,60.07 30.5,60.25
  pour Top: 26.61,61.75 34.26,61.75 34.26,59.54 26.61,59.54
VCC1
  Top 0.406: MONITOR1.1 66.17,65.94 67.32,64.8 73.61,64.8 77.55,60.86 IC2.P$12 81.84,60.86 C2.2
  Top 0.813: MONITOR1.1 62.34,65.94 R4.1 | 77.32,61.44 77.58,61.44 77.58,61.55 83.22,61.55 83.22,61.29 82.84,61.29 82.84,60.68 81.77,60.68 81.77,60.78 77.48,60.78 77.48,60.73 77.78,60.73 77.78,60.07 80.5,60.07 80.5,60.25
  pour Top: 76.61,61.75 84.26,61.75 84.26,59.54 76.61,59.54
VCC2
  Top 0.406: MONITOR2.1 16.17,32.94 17.32,31.8 23.61,31.8 27.55,27.86 IC3.P$12 31.84,27.86 C16.2
  Top 0.813: MONITOR2.1 12.34,32.94 R21.1 | 27.32,28.44 27.58,28.44 27.58,28.55 33.22,28.55 33.22,28.29 32.84,28.29 32.84,27.68 31.77,27.68 31.77,27.78 27.48,27.78 27.48,27.73 27.78,27.73 27.78,27.07 30.5,27.07 30.5,27.25
  pour Top: 26.61,28.75 34.26,28.75 34.26,26.54 26.61,26.54
VRELAY  (via drill 0.6)
  Top 2.54: POWER.1 29.64,80.37 29.69,80.42 | RELAY.P$4 31.02,81.76 29.69,80.42 | v29.69,80.04 29.69,80.42
  Bottom 2.54: RELAY.P$4 29.64,80.37 POWER.1
VRELAY1  (via drill 0.6)
  Top 2.54: POWER1.1 79.64,80.37 79.69,80.42 | RELAY1.P$4 81.02,81.76 79.69,80.42 | v79.69,80.04 79.69,80.42
  Bottom 2.54: RELAY1.P$4 79.64,80.37 POWER1.1
VRELAY2  (via drill 0.6)
  Top 2.54: POWER2.1 80.36,28.63 80.31,28.58 | RELAY2.P$4 78.98,27.24 80.31,28.58 | v80.31,28.96 80.31,28.58
  Bottom 2.54: RELAY2.P$4 80.36,28.63 POWER2.1

## Text on the board
Dimension: V-cut | V-cut | V-cut
tPlace: Q1 | Q1 | Q6 | R14 | Q6 | R14 | R12* | R12* | PEL_PWM/SWA/SWB | R13 | PEL_PWM/SWA/SWB | R13 | R10 | R10 | R11 | R11 | PEL / RED | PEL / RED | RELAY | RELAY | PEL / BLK | Q4 | PEL / BLK | Q4 | D1 | D2 | Q5 | D1 | D2 | Q5 | VRELAY/12V/GND | VRELAY/12V/GND | R20 | R3 | R2 | R1 | R20 | R3 | R2 | R1 | VCC/PG/EN | VCC/PG/EN | L1 | L1 | R19 | C6 | R19 | C6 | OUT+ | OUT+ | IN+ | IN+ | C3 | C9 | C3 | C9 | IC1 | IC1 | C5 | C5 | C8 | C8 | C7 | C7 | Q7 | C4 | Q7 | C4 | VRELAY/12V/GND | R20 | R3 | R2 | R1 | Q5 | D2 | D1 | VCC/PG/EN | L1 | R19 | C6 | Q4 | PEL / BLK | OUT+ | IN+ | RELAY | PEL / RED | C3 | C9 | IC1 | C5 | C8 | R11 | C7 | R10 | Q7 | C4 | R13 | PEL_PWM/SWA/SWB | R12* | R14 | Q6 | Q1